# Altium PCB PCB1.PcbDoc (part 1 of 2)
Units mil, origin at the board's own origin, x right, y up, seen from the top; angles counter-clockwise.
Board outline 3937.01 x 3937.01 mil, 2 copper layers (Top Layer, Bottom Layer); 175 components, 130 nets, 583 pads, 648 vias.
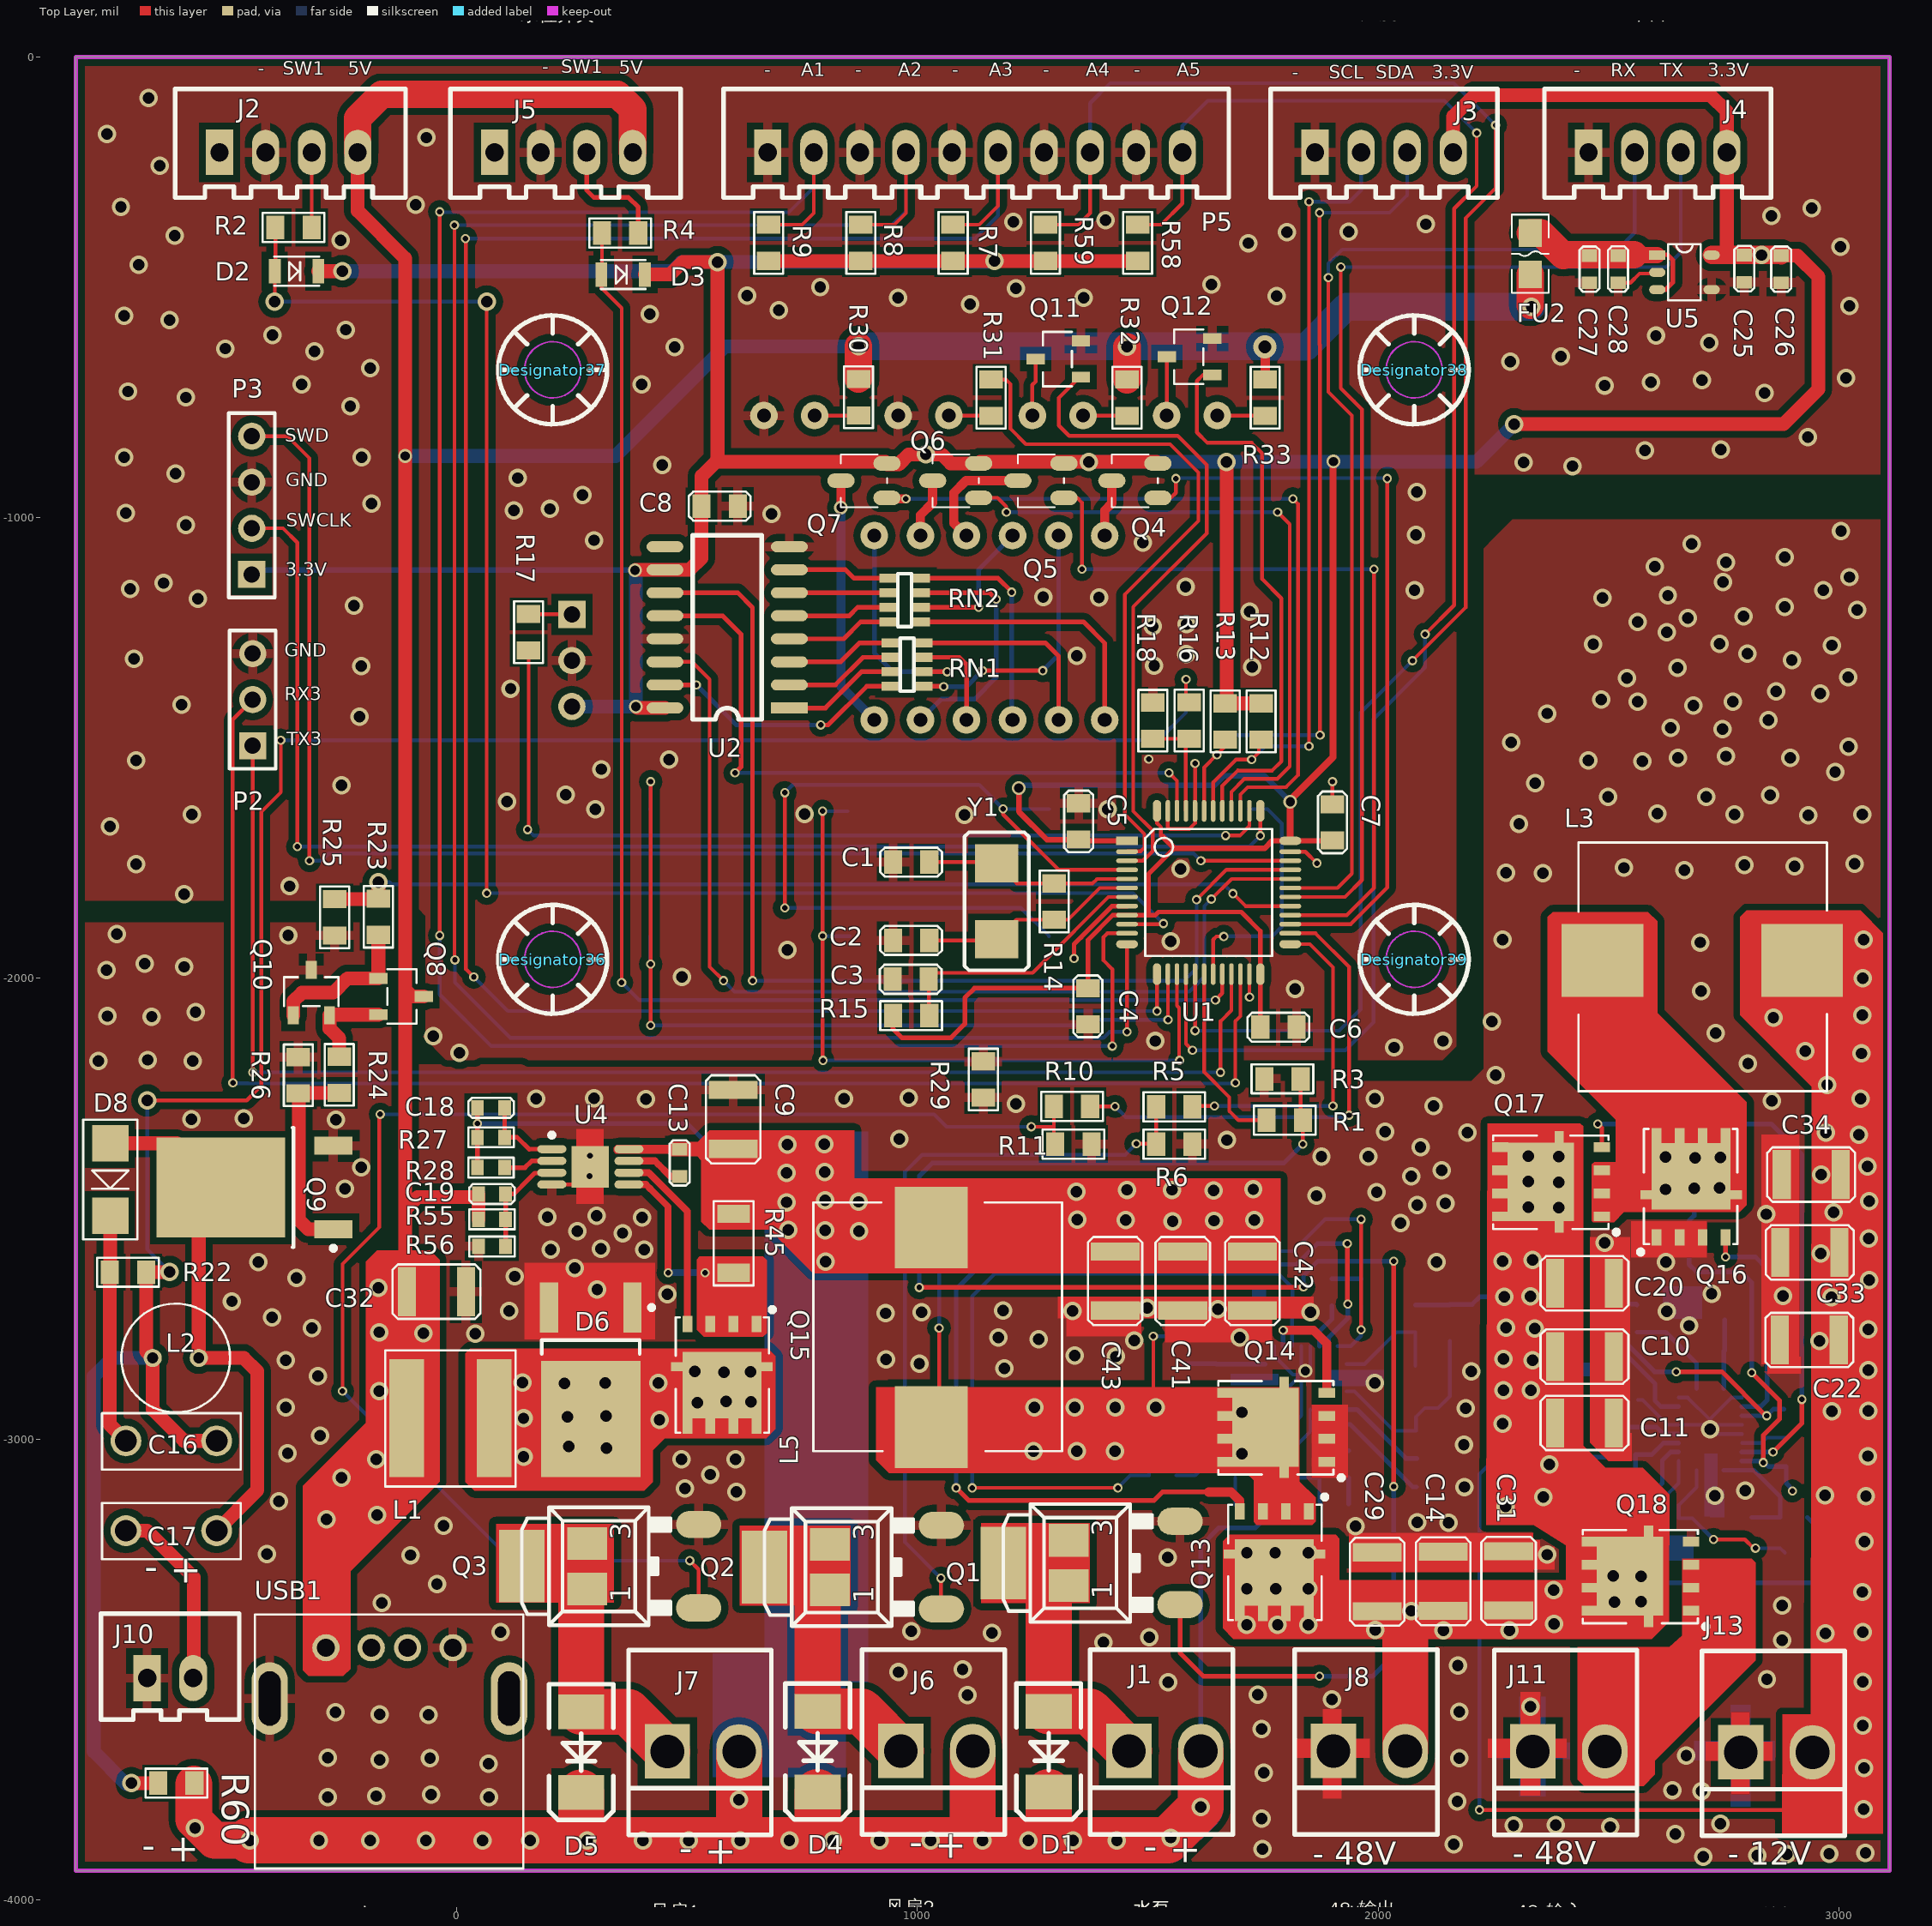
[diagram p0: Top Layer view]
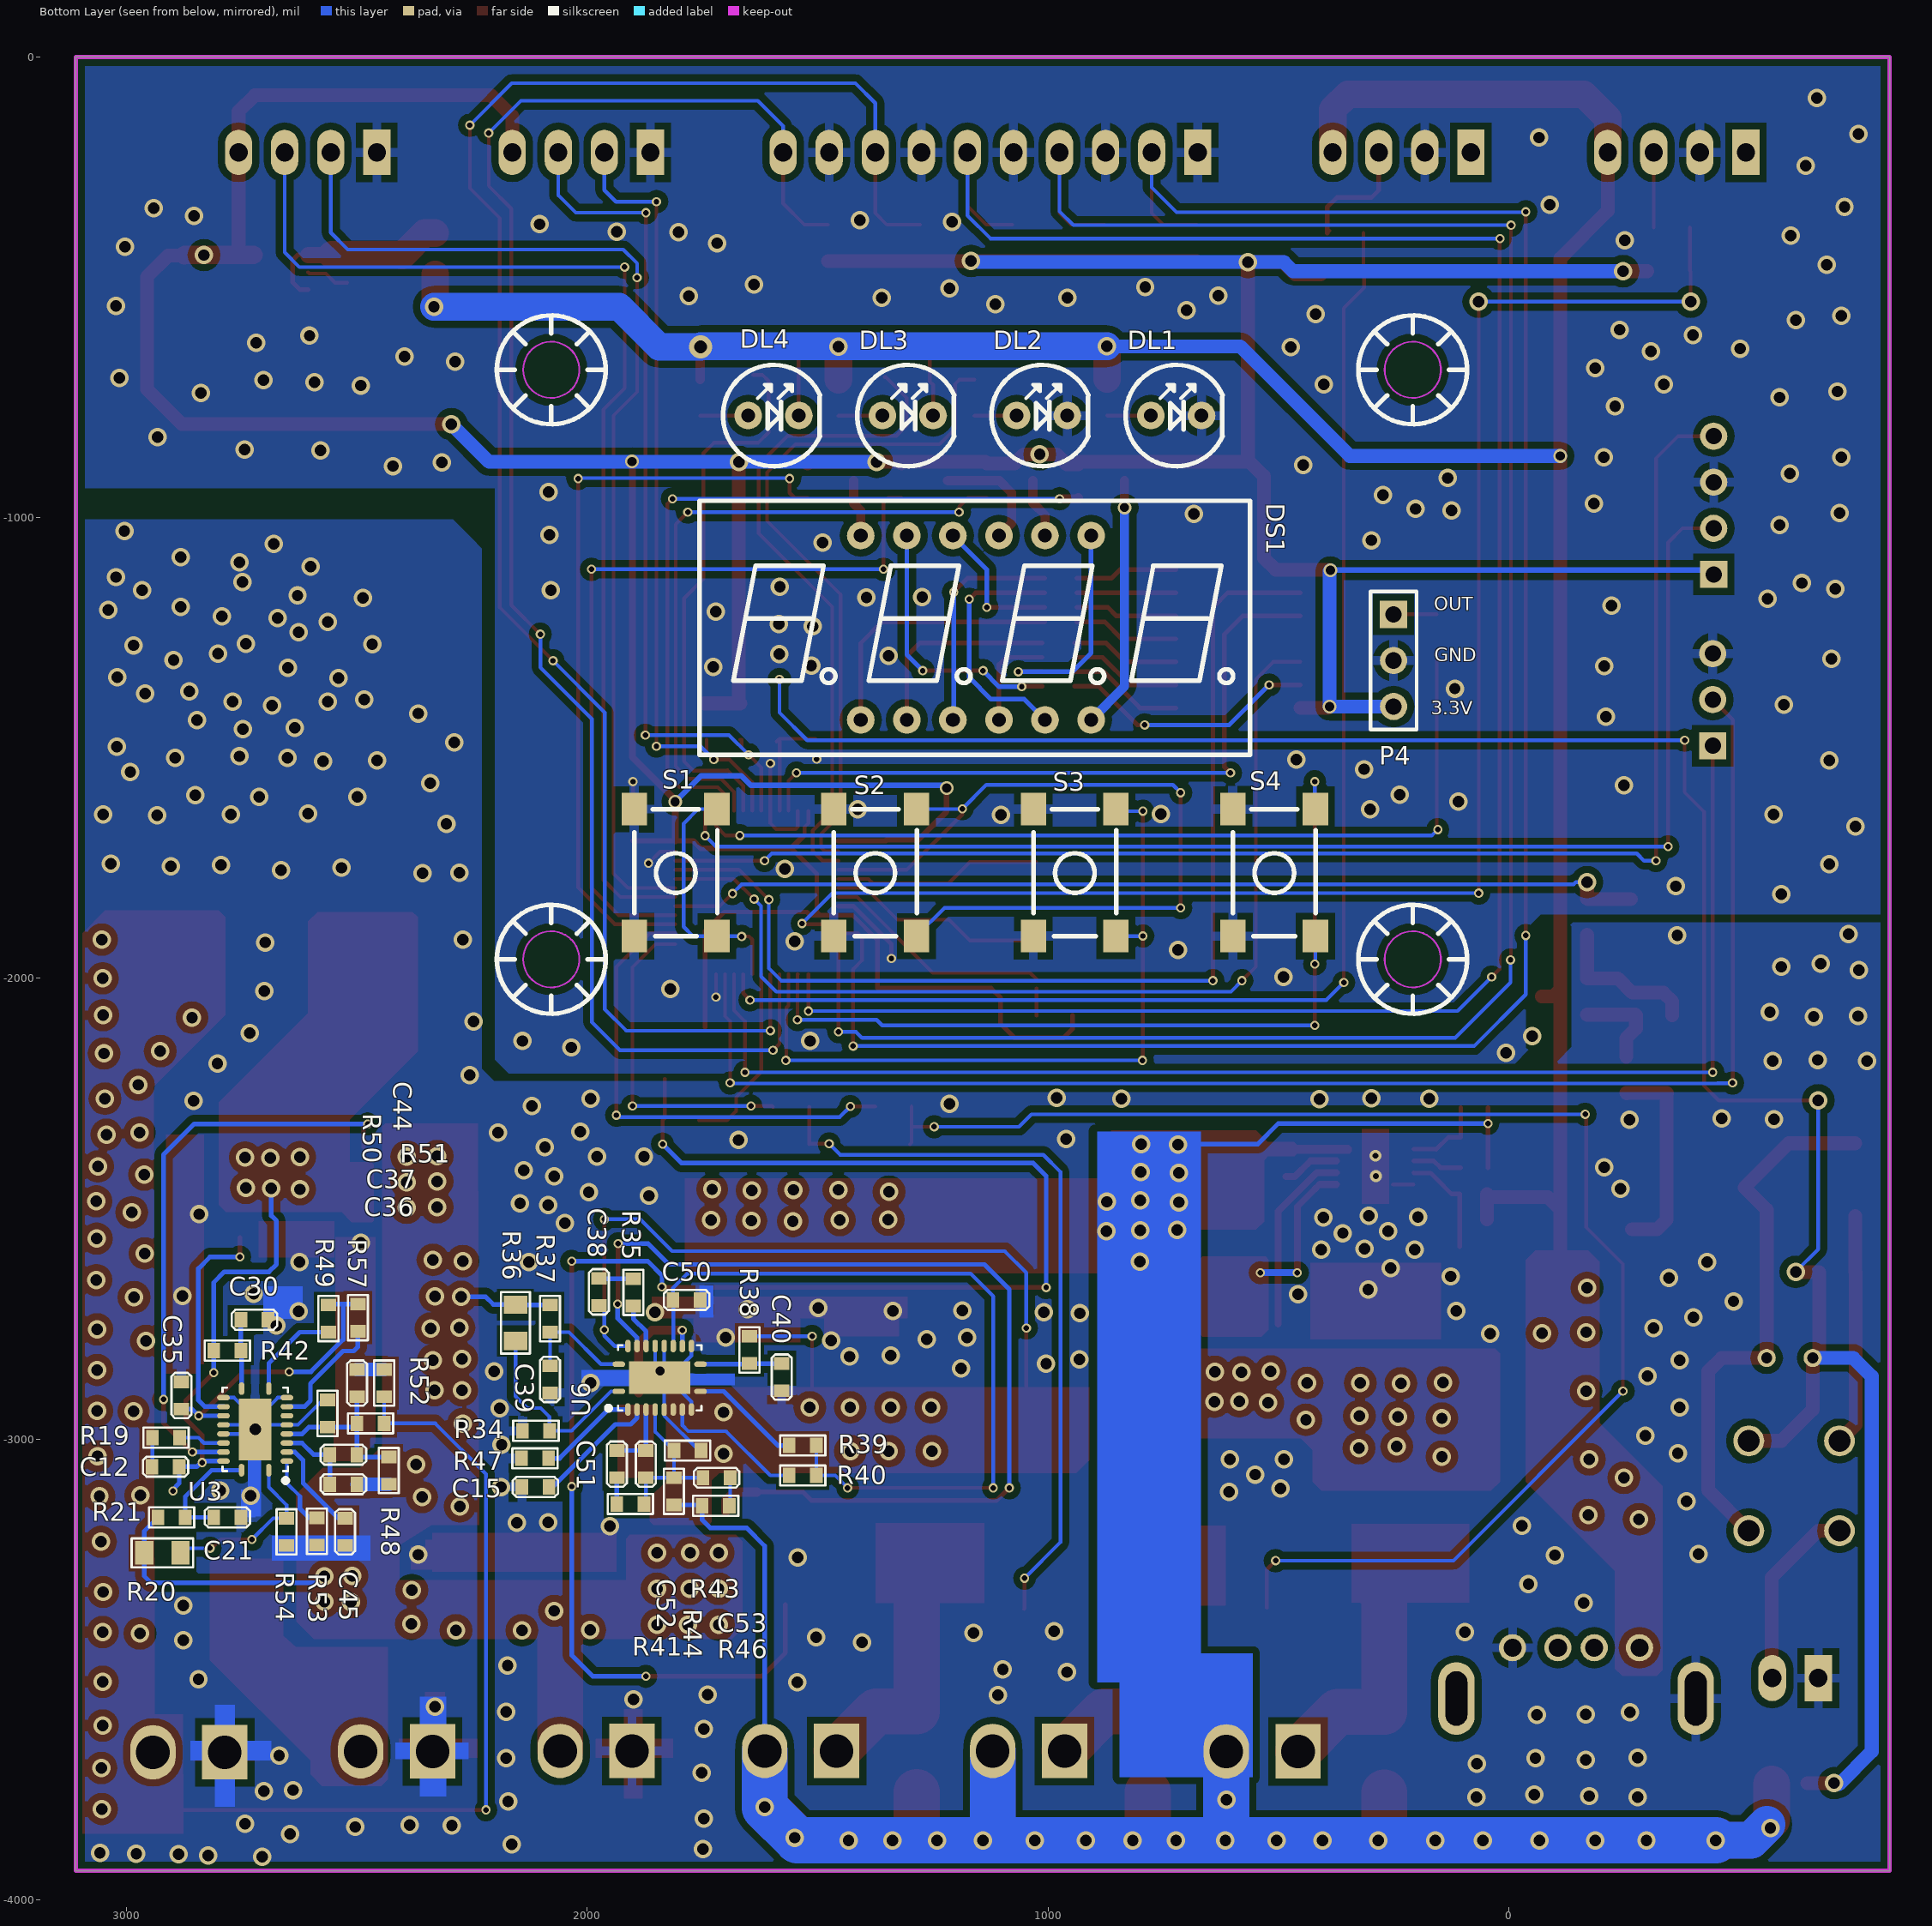
[diagram p1: Bottom Layer view, seen from below]

## Layer stack, top to bottom
Top Layer: signal copper 1.4
Dielectric: dielectric 12.6, FR-4, Dk 4.8
Bottom Layer: signal copper 1.4

## Board outline
-826.77,-3937.01 3110.24,-3937.01 3110.24,0 -826.77,0

## Design rules (kind name [scope] priority, off if disabled: settings)
Clearance Clearance_1 [InPoly And InNet(GND)  Or InNet(AGND1)] p1: gap=5
Clearance [All] p2: gap=5
MinimumSolderMaskSliver [All] p1: minsoldermaskwidth=1
PolygonConnect PolygonConnect_2 [InNet('GND') vs R29] p1: connectstyle=Direct reliefconductorwidth=10 reliefentries=4 polygonreliefangle="90 Angle"
PolygonConnect PolygonConnect_1 [IsVia] p2: connectstyle=Direct reliefconductorwidth=10 reliefentries=4 polygonreliefangle="90 Angle"
PolygonConnect [All] p3: connectstyle=Relief reliefconductorwidth=20 reliefentries=4 polygonreliefangle="90 Angle"
RoutingVias [All] p1: holewidth=28 width=50 viastyle="Through Hole" minholewidth=28 minwidth=50 maxholewidth=28 maxwidth=50
SilkToSilkClearance [All] p1: silktosilkclearance=1
SilkscreenOverComponentPads [All] p1: minsilkscreentomaskgap=1
SolderMaskExpansion [All] p1: expansion=4
Width [All] p1: maxlimit=200 minlimit=6 preferedwidth=10
25 further rules are at their usual default settings.

## Classes and differential pairs
component class Humidifier: C14 C15 C16 C17 C29 C31 C38 C39 C40 C41 C42 C43 C50 C51 C52 C53 D8 J10 L2 L5 Q8 Q9 Q10 Q13 Q14 R22 R23 R24 R25 R26 R34 R35 R36 R37 R38 R39 R40 R41 R43 R44 R46 R47 R60 U6
component class cpu: C1 C2 C3 C4 C5 C6 C7 P2 P3 P4 R12 R13 R14 R15 R16 R17 R18 U1 Y1
component class Display: C8 DS1 Q4 Q5 Q6 Q7 RN1 RN2 S1 S2 S3 S4 U2
component class Connector: D1 D2 D3 D4 D5 J1 J2 J3 J4 J5 J6 J7 J8 P5 Q1 Q2 Q3 R1 R2 R3 R4 R5 R6 R7 R8 R9 R10 R11 R58 R59
component class POWER: C9 C13 C18 C19 C25 C26 C27 C28 C32 D6 DL1 DL2 DL3 DL4 FU2 L1 Q11 Q12 Q15 R27 R28 R29 R30 R31 R32 R33 R45 R55 R56 U4 U5 USB1
component class POWER2: C9 C10 C11 C12 C13 C15 C22 C30 C33 C34 C35 C36 C37 C44 J11 J12 J13 L1 Q13 Q14 Q18 R19 R20 R21 R34 R38 R39 R40 R41 R43 R44 R46 R47 U3

## Components (designator, comment, footprint, x,y, rotation, side; value= is the part's Value field where it differs from the comment)
C1 "22pF" 0805c 947,-1747.62 r0 top
C2 "22pF" 0805c 947,-1917.62 r0 top
C3 "100nF" 0805c 946,-2002 r0 top
C4 "100nF" 0805c 1370,-2100 r90 top
C5 "100nF" 0805c 1350,-1620 r270 top
C6 "100nF" 0805c 1823,-2106 r180 top
C7 "100nF" 0805c 1901,-1622 r270 top
C8 "10uF" 0805c 610,-975 r180 top
C9 "10uF/35V" 1210C 600,-2370 r90 top
C10 "GRM32ER72A225KA35L" 1210C 2384,-2821 r0 top
C11 "GRM32ER72A225KA35L" 1210C 2384,-2965 r0 top
C12 "0.1uF/25V" 0603C 2945,-3060 r180 bottom
C13 "470nF/25V" 0603C 484,-2430 r90 top
C14 "GRM32ER72A225KA35L" 1210C 2141.17,-3372.72 r90 top
C15 "18nF/16V" 0603C 2083,-3104 r0 bottom
C16 "1nF/100V" CAP_5MM -718,-3004 r0 top
C17 "0.047F/250V" CAP_5MM -718,-3199 r0 top
C18 "1nF/25V" 0603C 45,-2281 r0 top
C19 "820pF/25V" 0603C 47.06,-2468 r0 top
C20 "GRM32ER72A225KA35L" 1210C 2384,-2662 r0 top
C21 "C1608X7S2A104K080AB" 0603C 2752,-3170 r0 bottom
C22 "GRM32ER71A476KE15L" 1210C 3000,-2785 r180 top
C25 "0.1uF/10V" 0603C 2795,-430 r270 top
C26 "10uF/10V" 0603C 2875,-490 r90 top
C27 "10uF/10V" 0603C 2459,-490 r90 top
C28 "0.1uF/10V" 0603C 2520.92,-430.92 r270 top
C29 "GRM32ER72A225KA35L" 1210C 1998.17,-3373.72 r90 top
C30 "6.8pF/100V" 0603C 2693,-2741 r0 bottom
C31 "GRM32ER72A225KA35L" 1210C 2283.22,-3371.72 r90 top
C32 "GRM32ER71A476KE15L" 1210C -108,-2680 r0 top
C33 "GRM32ER71A476KE15L" 1210C 3001,-2595 r180 top
C34 "GRM32ER71A476KE15L" 1210C 3004,-2426 r180 top
C35 "EMK107BB7225MA-T" 0603C 2881,-2935 r90 bottom
C36 "27nF/16V" 0603C 2559,-3098 r180 bottom
C37 "1pF/16V" 0603C 2559,-3034 r180 bottom
C38 "0.1uF/25V" 0603C 1975,-2651 r270 bottom
C39 "C1608X7S2A104K080AB" 0603C 2081,-2900 r90 bottom
C40 "5.1pF/100V" 0603C 1578,-2895 r90 bottom
C41 "GRM32ER71A476KE15L" 1210C 1576,-2593 r270 top
C42 "GRM32ER71A476KE15L" 1210C 1727,-2593 r270 top
C43 "GRM32ER71A476KE15L" 1210C 1429,-2593 r270 top
C44 "680pF/16V" 0603C 2500,-2908 r90 bottom
C45 "18nF/16V" 0603C 2526,-3172 r270 bottom
C50 "EMK107BB7225MA-T" 0603C 1814,-2698 r180 bottom
C51 "18nF/16V" 0603C 1936,-3025 r270 bottom
C52 "1pF/16V" 0603C 1873,-3024.94 r270 bottom
C53 "560pF/16V" 0603C 1749,-3083.94 r180 bottom
D1 "1N4004" D7227 1284.97,-3591 r270 top
D2 "1N4148" sod323 -395,-465 r0 top
D3 "1N4148" sod323 314,-472 r0 top
D4 "1N4004" D7227 783.49,-3591 r270 top
D5 "1N4004" D7227 270,-3592 r270 top
D6 "SBRD10200TR" TO228P970-3N 291,-2872 r270 top
D8 "FR104" SMA -752,-2358 r270 top
Designator36 "Comment" M3.1 208.2,-1958.6 r0 top
Designator37 "Comment" M3.1 208.2,-679.07 r0 top locked
Designator38 "Comment" M3.1 2078.28,-679.07 r0 top locked
Designator39 "Comment" M3.1 2078.28,-1958.6 r0 top locked
DL1 "红" LED-3 721.72,-778.37 r180 bottom locked
DL2 "绿" LED-3 1013.06,-778.37 r180 bottom locked
DL3 "黄" LED-3 1304.4,-778.37 r180 bottom locked
DL4 "黄" LED-3 1595.74,-778.37 r180 bottom locked
DS1 "SR410561K" SR410361 1156.49,-1239 r180 bottom locked
FU2 "500mA/6V" F0805 2330,-472 r90 top
J1 "OUT-A" CH3.96-2P 1615,-3677 r0 top
J2 "IIC" SIP-4L -515,-207 r0 top
J3 "IIC" SIP-4L 1863,-207 r0 top
J4 "USRT" SIP-4L 2457,-207 r0 top
J5 "IIC" SIP-4L 82,-207 r0 top
J6 "OUT-B" CH3.96-2P 1120,-3677 r0 top
J7 "OUT-C" CH3.96-2P 613,-3678 r0 top
J8 "SIP2-2.54" CH3.96-2P 2059,-3677 r0 top
J10 "SIP2-2.54" SIP-2L -622,-3519 r0 top
J11 "SIP2-2.54" CH3.96-2P 2492,-3678 r0 top
J13 "OUT-B" CH3.96-2P 2943,-3680 r0 top
L1 "XAL7070-332MEB" XAL7070 81,-2955 r180 top
L2 "10uH" 6*8 -610,-2824 r0 top
L3 "SRP1770TA-6R8M" SRP1270-2R2M 2487,-1961 r0 top
L5 "74437358082" SRP1270-2R2M 1030,-2974 r90 top
P2 "Header 3" HDR1X3 -443,-1495 r90 top
P3 "Header 4" HDR1X4 -445,-1123 r90 top
P4 "Header 3" HDR1X3 250,-1210 r270 bottom
P5 "Header 10" SIP-10L 675,-207 r0 top
Q1 "NCE4060K" TO-252-3S 1324,-3269 r90 top
Q2 "NCE4060K" TO-252-3S 806,-3278 r90 top
Q3 "NCE4060K" TO-252-3S 279,-3276 r90 top
Q4 "S8550" SOT-23_B 1522,-957 r90 top
Q5 "S8550" SOT-23_B 1318,-957 r90 top
Q6 "S8550" SOT-23_B 1133,-957 r90 top
Q7 "S8550" SOT-23_B 934,-957 r90 top
Q8 "S8050" SOT23-3 -170,-2000 r180 top
Q9 "12N10L" TO230P973X238-3N -439,-2454 r180 top
Q10 "S9015" SOT23-3 -355,-2080 r270 top
Q11 "S8050" SOT23-3 1355,-695 r0 top
Q12 "S8050" SOT23-3 1640,-690 r0 top
Q13 "CSD19537Q3" "PowerPAK SO-8" 1876.17,-3119.72 r270 top
Q14 "CSD19537Q3" "PowerPAK SO-8" 1926,-3076 r180 top
Q15 "Si7149DP" "PowerPAK SO-8" 677,-2713 r270 top
Q16 "FDWS86068-F085" "PowerPAK SO-8" 2578,-2600 r90 top
Q17 "CSD19537Q3" "PowerPAK SO-8" 2523,-2543 r180 top
Q18 "SI7489DP" "PowerPAK SO-8" 2717,-3399 r180 top
R1 "22R" 0805R 1758,-2308 r0 top
R2 "10K" 0805R -315,-370 r180 top
R3 "470K" 0805R 1753,-2218 r0 top
R4 "10K" 0805R 394,-382 r180 top
R5 "22R" 0805R 1597,-2279 r180 top
R6 "470k" 0805R 1597,-2359.74 r180 top
R7 "10K" 0805R 1077.5,-364 r270 top
R8 "10K" 0805R 877.25,-364 r270 top
R9 "10K" 0805R 677,-364 r270 top
R10 "22R" 0805R 1375,-2278 r180 top
R11 "470k" 0805R 1378,-2359.74 r180 top
R12 "2K" 0805R 1746,-1403 r270 top
R13 "2K" 0805R 1668,-1403 r270 top
R14 "1MR" 0805R 1297,-1872.62 r90 top
R15 "10K" 0805R 947,-2081 r0 top
R16 "47K" 0805R 1590,-1401 r270 top
R17 "100" 0805R 156,-1288 r90 top
R18 "10K" 0805R 1511,-1480 r90 top
R19 "0" 0603R 2944,-2997 r180 bottom
R20 "121K" 0805R 2883,-3247 r0 bottom
R21 "2.2" 0603R 2932,-3170 r180 bottom
R22 "1K" 0805R -753,-2638 r0 top
R23 "470" 0805R -170,-1827 r270 top
R24 "10" 0805R -255,-2170 r270 top
R25 "1K" 0805R -265,-1907 r90 top
R26 "47K" 0805R -344,-2171 r270 top
R27 "2.94K" 0603R 45,-2345 r0 top
R28 "44.2K" 0603R 104,-2411 r180 top
R29 "0R" 0805R 1143,-2259 r90 top
R30 "2K" 0805R 872,-778 r90 top
R31 "2K" 0805R 1160,-779 r90 top
R32 "2K" 0805R 1455,-779 r90 top
R33 "2K" 0805R 1755,-779 r90 top
R34 "8.06K" 0603R 2141,-2982 r180 bottom
R35 "0" 0603R 1900,-2652 r270 bottom
R36 "121K" 0805R 2156,-2787 r90 bottom
R37 "2.2" 0603R 2081,-2709 r270 bottom
R38 "1.62K" 0603R 1648,-2777 r270 bottom
R39 "20K" 0603R 1562,-3014 r180 bottom
R40 "20K" 0603R 1562,-3079 r180 bottom
R41 "3.16K" 0603R 1877,-3140.94 r0 bottom
R42 "1.62K" 0603R 2811,-2808 r180 bottom
R43 "1.27K" 0603R 1812,-3024.94 r180 bottom
R44 "18K" 0603R 1812,-3142.94 r90 bottom
R45 "10mR" 1206R 601,-2511 r270 top
R46 "28" 0603R 1751,-3144.94 r180 bottom
R47 "46.4K" 0603R 2143,-3042 r180 bottom
R48 "2.32K" 0603R 2431,-3039 r270 bottom
R49 "20K" 0603R 2562,-2768 r90 bottom
R50 "1.27K" 0603R 2564,-2974 r90 bottom
R51 "18K" 0603R 2441,-2966 r0 bottom
R52 "14.7" 0603R 2441,-2908 r90 bottom
R53 "28K" 0603R 2587,-3230 r90 bottom
R54 "8.06K" 0603R 2653,-3231 r90 bottom
R55 "10K" 0603R 47.06,-2523 r0 top
R56 "3.32K" 0603R 106.06,-2582 r180 top
R57 "20K" 0603R 2498,-2766 r90 bottom
R58 "10K" 0805R 1478,-364 r270 top
R59 "10K" 0805R 1277.75,-442.74 r90 top
R60 "2A保险丝" 0805R -648,-3747 r0 top
RN1 "8P100R 0603" 8P4R_0603 942.45,-1271.56 r0 top
RN2 "8P100R 0603" 8P4R_0603 937.45,-1131.56 r0 top
S1 "SW-PB" BUTTON_SMT_6*6 1808.34,-1770.5 r90 bottom locked
S2 "SW-PB" BUTTON_SMT_6*6 1375.27,-1770.5 r90 bottom locked
S3 "SW-PB" BUTTON_SMT_6*6 942.2,-1770.5 r90 bottom locked
S4 "SW-PB" BUTTON_SMT_6*6 509.13,-1770.5 r90 bottom locked
U1 "STM32F103C8T6" TQFP-48 1455,-1725 r0 top
U2 "SN74HC595D" SO-16N 765,-1440 r180 top
U3 "LM5145" QFN050P600-8N 2721,-2979 r0 bottom
U4 "LM25085" SOP65P490X265_HS-8N 290,-2409 r0 top
U5 "TLV70233DBVR" SOT23-5(DBV) 2606,-430 r0 top
U6 "LM5145" QFN050P600-8N 1843,-2867 r90 bottom
USB1 "Header 5" USB-A -284,-3453 r0 top
Y1 "8MHz" SMT5032 1172,-1832.62 r90 top

## Footprints (in the part's own frame and the unit in brackets; to place one, negate y for a bottom-side part, rotate by r counter-clockwise, add the part's x,y. Pads: shape width x height; smd on the part's side, far side on the other; paste and mask are expansions set on the pad)
6*8 [mm]
  round 1 hole 0.6: 1(1.27,0) 2(-1.27,0)
  silkscreen extent -3,-3 3,3
8P4R_0603 [mil]
  rect 40x19.68 smd: 1(0,0) 2(70,0) 3(0,-31.49) 4(70,-31.49) 5(0,-62.99) 6(70,-62.99) 7(0,-94.49) 8(70,-94.49)
  silkscreen extent 20,-105 50,10
0603C [mm]
  rect 0.7x0.85 smd: 1(0,0) 2(1.5,0)
  silkscreen extent -0.5,-0.55 2,0.55
0603R [mm]
  rect 0.7x0.85 smd: 1(0,0) 2(1.5,0)
  silkscreen extent -0.5,-0.55 2,0.55
0805c [mm]
  rect 1x1.3 smd: 1(0,0) 2(2,0)
  silkscreen extent -0.7,-0.8 2.7,0.8
0805R [mm]
  rect 1x1.3 smd: 1(0,0) 2(2,0)
  silkscreen extent -0.7,-0.8 2.7,0.8
1206R [mm]
  rect 1x1.8 smd: 1(0,0) 2(3.25,0)
  silkscreen extent -0.7,-1.1 3.95,1.1
1210C [mm]
  rect 1x2.7 smd: 1(0,0) 2(3.25,0)
  silkscreen extent -0.8,-1.5 4.05,1.5
BUTTON_SMT_6*6 [mm]
  rect 1.8x1.4 smd paste+0: 1(-3.5,2.275) 1(3.5,2.275) 2(-3.5,-2.275) 2(3.5,-2.275)
  silkscreen extent -3.5,-2.3 3.48,2.27
CAP_5MM [mm]
  round 1.7 hole 1.2: 1(0,0) 2(5,0)
  silkscreen extent -1.32,-1.57 6.32,1.52
CH3.96-2P [mm]
  rect 2.5x3 hole 1.85: 1(-3.96,0)
  oval 2.5x3 hole 1.85: 2(0,0)
  silkscreen extent -6.1,-4.6 1.78,5.59, body extent -5.94,-3.91 1.92,4.59, height 10.9
D7227 [mil]
  rect 75x100 smd: A(0,0) K(175,0)
  silkscreen extent -60,-70 235,70, body extent -22,-57 194,53, height 88
F0805 [mil]
  rect 60x50 smd: 1(0,0) 2(90,0)
  silkscreen extent -40,-40 130,40, body extent 4,-23 82,24, height 20
HDR1X3 [mm] "Connector; Header; 3 Position"
  rect 1.5x1.5 hole 0.9: 1(0,0)
  round 1.5 hole 0.9: 2(2.54,0) 3(5.08,0)
  silkscreen extent -1.27,-1.27 6.35,1.27
HDR1X4 [mm] "Connector; Header; 4 Position"
  rect 1.5x1.5 hole 0.9: 1(0,0)
  round 1.5 hole 0.9: 2(2.54,0) 3(5.08,0) 4(7.62,0)
  silkscreen extent -1.27,-1.27 8.89,1.27
LED-3 [mil]
  round 60 hole 30: A(-55,0) K(55,0)
  silkscreen extent -110,-110 101,110
M3.1 [mil]
  Keep-Out Layer circle w3.94: c0,0 r61.02
  silkscreen extent -118,-118 118,118
"PowerPAK SO-8" [mm]
  rect 0.9x0.54 smd: 1(0.95,-0.67) 2(0.95,-1.94) 3(0.95,-3.21) 4(0.95,-4.48) 5(6.548,-4.48) 6(6.548,-3.21) 7(6.548,-1.94) 8(6.548,-0.67)
  rect 0.5x1.6 smd: 5(3.3,-4.575) 8(3.3,-0.575)
  rect 3.66x2.5 smd: 5(4.325,-3.495)
  rect 3.66x2 smd: 8(4.325,-1.401)
  silkscreen extent 0.03,-5.12 6.93,0.33
QFN050P600-8N [mm]
  oval 0.3x0.7 smd: 1(-0.75,2.25) 10(-0.75,-2.25) 11(0.75,-2.25) 20(0.75,2.25)
  oval 0.7x0.3 smd: 2(-1.75,1.75) 3(-1.75,1.25) 4(-1.75,0.75) 5(-1.75,0.25) 6(-1.75,-0.25) 7(-1.75,-0.75) 8(-1.75,-1.25) 9(-1.75,-1.75) 12(1.75,-1.75) 13(1.75,-1.25) 14(1.75,-0.75) 15(1.75,-0.25) 16(1.75,0.25) 17(1.75,0.75) 18(1.75,1.25) 19(1.75,1.75)
  rect 1.8x3.4 smd: 21(0,0)
  silkscreen extent -1.8,-2.3 1.8,2.94, body extent -1.8,-2.3 1.8,2.3, height 0.8
SIP-2L [mil]
  rect 60x100 hole 40: 1(-50,0)
  oval 60x100 hole 40: 2(50,0)
  silkscreen extent -150,-90 150,140
SIP-4L [mm]
  rect 1.5x2.5 hole 1: 1(0,0)
  oval 1.5x2.5 hole 1: 2(2.54,0) 3(5.08,0) 4(7.62,0)
  silkscreen extent -2.44,-2.5 10.26,3.5
SIP-10L [mm]
  rect 1.5x2.5 hole 1: 1(0,0)
  oval 1.5x2.5 hole 1: 2(2.54,0) 3(5.08,0) 4(7.62,0) 5(10.16,0) 6(12.7,0) 7(15.24,0) 8(17.78,0) 9(20.32,0) 10(22.86,0)
  silkscreen extent -2.44,-2.5 25.43,3.5
SMA [mm]
  rect 2x2 smd: 1(0,0) 2(4,0)
  silkscreen extent -1.3,-1.5 5.3,1.5
SMT5032 [mm]
  rect 2.1x2.4 smd: 1(-2.1,0) 2(2.1,0)
  silkscreen extent -3.81,-1.78 3.81,1.78
SO-16N [mil]
  rect 80x24 smd: 1(43,-27)
  oval 80x24 smd: 2(43,-77) 3(43,-127) 4(43,-177) 5(43,-227) 6(43,-277) 7(43,-327) 8(43,-377) 9(313,-377) 10(313,-327) 11(313,-277) 12(313,-227) 13(313,-177) 14(313,-127) 15(313,-77) 16(313,-27)
  silkscreen extent 103,-402 253,-2, body extent 62,-403 300,3, height 84
sod323 [mm]
  rect 0.65x1.35 smd: A(0,0) K(2.4,0)
  silkscreen extent -0.03,-0.8 2.44,0.8
SOP65P490X265_HS-8N [mm] "SOP, 8-Leads, Body 3.1x3.1mm (max), Pitch 0.65mm, IPC Medium Density"
  oval 1.6x0.45 smd: 1(-2.125,0.975) 2(-2.125,0.325) 3(-2.125,-0.325) 4(-2.125,-0.975) 5(2.125,-0.975) 6(2.125,-0.325) 7(2.125,0.325) 8(2.125,0.975)
  rect 2.05x2.3 smd: 9(0,0)
  silkscreen extent -2.25,1.63 -2,1.87, body extent -1.55,-1.55 1.55,1.55, height 2.65
SOT23-3 [mm]
  rect 1x0.6 smd: 1(0,0) 2(0,2) 3(-2.5,1)
  silkscreen extent -2.1,-0.5 -0.5,2.5
SOT23-5(DBV) [mm]
  rect 0.9x0.5 smd: 1(0,0)
  oval 0.9x0.5 smd: 2(0,-0.95) 3(0,-1.9) 4(3,-1.9) 5(3,0)
  silkscreen extent 0.6,-2.5 2.4,0.6
SOT-23_B [mm]
  oval 0.8x1.5 smd: 1(0,0) 2(1.9,0) 3(0.95,2.54)
  silkscreen extent -0.51,0 2.4,2.54, body extent -0.48,-0.13 2.42,2.67, height 1.2
SR410361 [mil]
  round 60 hole 30: a(-150,200) b(250,200) c(50,-200) com1(-250,200) com2(50,200) com3(150,200) com4(250,-200) d(-150,-200) dp(-50,-200) e(-250,-200) f(-50,200) g(150,-200)
  silkscreen extent -600,-276 595,276, body extent -591,-275 591,276, height 287
SRP1270-2R2M [mm]
  rect 4.5x4 smd: 1(0,0) 2(11,0)
  silkscreen extent -1.32,-7.21 12.38,6.5
TO228P970-3N [mm]
  rect 2.75x1 smd: 1(-4,2.3) 3(-4,-2.3)
  rect 6.4x5.5 smd: 2(2.15,0)
  silkscreen extent -4.12,-2.7 -1.45,3.48, body extent -2.2,-2.7 3.5,2.7, height 2.38
TO230P973X238-3N [mm] "D-PAK, 3-Pads, Body 6.2x6.6mm (max), IPC Medium Density"
  rect 2.1x1 smd: 1(-4.35,2.3) 3(-4.35,-2.3)
  rect 7.1x5.5 smd: 2(1.85,0)
  silkscreen extent -4.48,-3.3 -2.1,3.47, body extent -2.15,-3.3 4.05,3.3, height 2.38
TO-252-3S [mm]
  oval 1.5x2.5 smd: 1(-2.3,-6.25) 3(2.3,-6.25)
  rect 1.8x2.2 smd: 2(-1.25,-0.1) 2(1.25,-0.1)
  rect 4x2.5 smd: 2(0,3.5)
  silkscreen extent -3.25,-4.7 3.25,3.5
TQFP-48 [mm]
  rect 1.2x0.45 smd: 1(0,0.6)
  oval 1.2x0.25 smd: 2(0,0) 3(0,-0.5) 4(0,-1) 5(0,-1.5) 6(0,-2) 7(0,-2.5) 8(0,-3) 9(0,-3.5) 10(0,-4) 11(0,-4.5) 26(9,-4.5) 27(9,-4) 28(9,-3.5) 29(9,-3) 30(9,-2.5) 31(9,-2) 32(9,-1.5) 33(9,-1) 34(9,-0.5) 35(9,0)
  oval 1.2x0.45 smd: 12(0,-5.1) 25(9,-5.1) 36(9,0.6)
  oval 0.45x1.2 smd: 13(1.65,-6.75) 24(7.35,-6.75) 37(7.35,2.25) 48(1.65,2.25)
  oval 0.25x1.2 smd: 14(2.25,-6.75) 15(2.75,-6.75) 16(3.25,-6.75) 17(3.75,-6.75) 18(4.25,-6.75) 19(4.75,-6.75) 20(5.25,-6.75) 21(5.75,-6.75) 22(6.25,-6.75) 23(6.75,-6.75) 38(6.75,2.25) 39(6.25,2.25) 40(5.75,2.25) 41(5.25,2.25) 42(4.75,2.25) 43(4.25,2.25) 44(3.75,2.25) 45(3.25,2.25) 46(2.75,2.25) 47(2.25,2.25)
  silkscreen extent 1,-5.75 8,1.25
USB-A [mm]
  round 1.5 hole 1: 1(0,0) 2(2.5,0) 3(4.5,0) 4(7,0)
  oval 2x4 hole 1.2 slot 3 at 90 deg: 5(-3.1,-2.8) 6(10.1,-2.8)
  silkscreen extent -3.91,-12.17 10.89,1.83
XAL7070 [mm]
  rect 1.92x6.5 smd: 1(0,0) 2(4.82,0)
  silkscreen extent -1.19,-3.74 6.01,3.76

## Part data
C1 C2 C3 C4 C5 C6 C7 C8: library part CAP, "Capacitor"
C9 C10 C11 C12 C13 C14 C15 C18 C19 C20 C21 C22 C29 C30 C31 C32 C33 C34 C35 C36 C37 C38 C39 C40 C41 C42 C43 C44 C45 C50 C51 C52 C53: library part 0.01UF, "CCX85-103"
C16 C17 C25 C26 C27 C28: library part Cap, "Capacitor"
D1 D4 D5 D6 D8: library part Diode_2, "Default Diode"
D2 D3: library part Diode, "Default Diode"
DL1 DL2 DL3 DL4: library part L-7113SRD-D, "CP-L-7113SRD-D"
DS1: "CP-SR410561K"
FU2: library part FUSE2, "Fuse"
J1 J6 J7 J13: library part CON2, "Connector"
J2 J3 J4 J5: library part SIP4-2.54, "CN-SIP4-2.54"
J8 J10 J11: "CN-SIP2-2.54"
L1 L3 L5: library part INDUCTOR
L2: library part Inductor, "Inductor"
P2 P4: "Header, 3-Pin"
P3: "Header, 4-Pin"
P5: "Header, 10-Pin"
Q1 Q2 Q3: "NMOSFET"
Q4 Q5 Q6 Q7: library part PNP, "PNP Transistor"
Q8 Q11 Q12: library part NPN, "NPN Bipolar Transistor"
Q9: library part MOSFET-N, "N-Channel MOSFET"
Q10: library part PNP, "PNP Bipolar Transistor"
Q13 Q14 Q15 Q16 Q17 Q18: library part Si4004DY, "Si4004DY"
R1 R2 R3 R4 R5 R6 R7 R8 R9 R10 R11 R30 R31 R32 R33 R58 R59: library part 1K, "CR85-102J"
R12 R13 R14 R15 R16 R17 R18 R19 R35 R38 R41 R42 R43 R44 R46 R48 R50 R51 R52: library part Res3, "Resistor"
R20 R21 R27 R28 R34 R36 R37 R39 R40 R45 R47 R49 R53 R54 R55 R56 R57: library part "Res Semi", "Semiconductor Resistor"
R22 R23 R24 R25 R26 R29 R60: library part RES1
RN1 RN2: library part "8P4R 0603"
S1 S2 S3 S4: "Switch"
U1: "STM32 ARM-based 32-bit MCU with 64 Kbytes Flash, 48-pin LQFP, Industrial Temperature"
U2: "8-Bit Shift Register with 3-State Output Registers"
U5: library part TLV70230DBVR
USB1: "Header, 5-Pin"
Y1: library part XTAL, "Crystal Oscillator"

## Via types
v1: diameter 40, hole 25, Top Layer to Bottom Layer, tented both sides, 514 vias
v2: diameter 20, hole 12, Top Layer to Bottom Layer, tented both sides, 122 vias
v3: diameter 30, hole 20, Top Layer to Bottom Layer, tented both sides, 9 vias
v4: diameter 25.98, hole 12.99, Top Layer to Bottom Layer, tented top, 2 vias
v5: diameter 50, hole 28, Top Layer to Bottom Layer, 1 vias

## Nets (pads, with @x,y where several pads share a name; then routed paths per layer and width w, separated by ;. In a path a pad name is that pad's centre, name@x,y a point inside that pad or via, vN(x,y) a via of type N, cw(c..) or ccw(c..) an arc to the next point about the centre after c; other vN are vias at no path point)
+5V: C19.1 C32.1 FU2.1 J2.4 J5.4 L1.2 Q8.3 R30.2 R32.2 R33.2 R55.1 USB1.1 | length 6443.7
  Top Layer w20: v3(1754,-629) 1755,-630 R33.2@1755,-700.26
  Top Layer w30: J2.4@-215,-207 -215,-334 -112,-437 v3(-112,-866) -112,-2024 ; C32.1@-108,-2680 -112,-2676 -112,-2024 ; -108,-2498 -85,-2475 C19.1@47.06,-2475 ; Q8.3@-71.57,-2039.37 -96.63,-2039.37 -112,-2024 ; R55.1@47.06,-2523 C19.1@47.06,-2468
  Top Layer w60: J2.4@-215,-207 -215,-133 -163,-81 349,-81 382,-114 J5.4@382,-207 ; R30.2@872,-699.26 v1(872,-628) ; R32.2@1455,-700.26 v1(1455,-629) ; v1@2330,-539 FU2.1@2330,-472
  Bottom Layer w30: v3(-112,-866) 345,-866 583,-628 v1(872,-628)
  Bottom Layer w60: v1(872,-628) 1455,-628 1507,-628 v5@1754,-628 ; v3(1754,-629) 1844,-629 1931,-542 v1(2333,-542)
  other v1: -283,-3174 -173,-3165 -250,-3084 -175,-3044 -168,-2896 -72,-2770 -168,-2768 -170,-2672
  other v5: 1754,-629
+12V: C9.1 C13.2 C18.1 C41.1 C42.1 C43.1 D1.K D4.K D5.K J1.2 J6.2 J7.2 L5.2 R27.1 R28.2 R44.1 R45.1 R46.1 R60.2 U4.8 | length 7380.7
  Top Layer w10: R28.2@44.94,-2411 45,-2410.94 R27.1@45,-2345 C18.1@45,-2281
  Top Layer w80: R60.2@-571,-3749 -571,-3826 -526,-3871 v1@-450,-3871
  Top Layer w100: v1@-450,-3871 262,-3871 ; D5.K@270,-3767 270,-3863 262,-3871 ; J7.2@613,-3678 613,-3869 v1@611,-3871 ; D4.K@783.49,-3766 783.49,-3863.51 776,-3871 ; J6.2@1120,-3677 1120,-3867 1116,-3871 ; 1284.97,-3868.03 D1.K@1284.97,-3766 ; J1.2@1615,-3677 v1(1615,-3799) 1543,-3871 1116,-3871 ; 262,-3871 v1@611,-3871 ; v1@611,-3871 776,-3871 ; 776,-3871 1116,-3871
  Bottom Layer w10: v2(45,-2315) 500,-2315 545,-2360 v1@718,-2360 ; J1.2@1615,-3677 1615,-3232 1654,-3193 1733,-3193 1751,-3175 R46.1@1751,-3144.94 1753,-3142.94 R44.1@1812,-3142.94
  Bottom Layer w80: v1@-560.5,-3836.5 -526,-3871 v1(-449,-3871)
  Bottom Layer w100: v1(-449,-3871) 1544,-3871 1615,-3800 J1.2@1615,-3677 ; v1@613,-3867 J7.2@613,-3678 ; 1120,-3868 J6.2@1120,-3677
  other v1: -299,-3871 -188,-3871 -67,-3871 56,-3871 159,-3871 283,-3871 404,-3871 504,-3871 615,-3871 722,-3871 816,-3871 918,-3871 1029,-3871 1141,-3871 1241,-3871 1338,-3871 1433,-3871 1549.69,-3865.31 -568,-3844 613,-3783 801,-2615 873,-2549 800,-2547 720,-2546 1554,-2527 1644,-2526 1452,-2525 1731,-2525 1347,-2524 716,-2486 872,-2485 800,-2482 1345,-2463 1643,-2460 1455,-2459 1553,-2459 1729,-2458 716,-2422 799,-2420 718,-2361 798,-2360
+48V: J11.2 Q18.1 Q18.2 Q18.3
A1: P5.2 R9.1 U1.11 | length 4655
  Top Layer w8: v2(-37,-1907) v2(-37,-336) ; R9.1@677,-364 750,-364 775,-339 P5.2@775,-207 ; v2(1423,-2147) 1423,-1980 1404,-1961 1404,-1910.38 1412.21,-1902.17 U1.11@1455,-1902.17
  Bottom Layer w8: v2(-37,-1907) -37,-2035 75,-2147 v2(1423,-2147) ; v2@-37,-337 694,-337 721,-337 775,-283 P5.2@775,-207
A2: P5.4 R8.1 U1.12 | length 4708.3
  Top Layer w8: v2@-5,-1959 v2(-5,-365) ; R8.1@877.25,-364 950,-364 975,-339 P5.4@975,-207 ; 1455,-2106 U1.12@1455,-1925.79
  Bottom Layer w8: v2(-5,-365) 832.44,-365 ; v2(-4,-1960) -4,-2009 116,-2129 1404,-2129 1417,-2116 v2(1455,-2116) ; 822,-365 832.44,-365 ; P5.4@975,-207 975,-335 945,-365 832.44,-365
A3: P5.6 R7.1 U1.13 | length 4773.6
  Top Layer w8: v2@20,-395 20,-1980 v2(37,-1997) ; R7.1@1077.5,-364 1134,-364 1175,-323 P5.6@1175,-207 ; v2(1519.96,-2071) U1.13@1519.96,-1990.75
  Bottom Layer w8: v2(19,-394) 1017.5,-394 ; v2(37,-1997) 111,-2071 v2(1519.96,-2071) ; 991,-394 1017.5,-394 ; P5.6@1175,-207 1175,-344 1125,-394 1017.5,-394
A4: P5.8 R59.2 U1.17 | length 3834
  Top Layer w8: R59.2@1277.75,-364 1350,-364 1375,-339 P5.8@1375,-207 ; v2(1602.64,-2113.64) U1.17@1602.64,-1990.75 ; v2(2074.5,-1310.5) 2190,-1195 2190,-350 2255,-285 v2(2255,-148)
  Bottom Layer w8: P5.8@1375,-207 1375,-100 1418,-57 2164,-57 v2(2255,-148) ; v2(1602.64,-2113.64) 1915.36,-2113.64 1962,-2067 1962,-1769 ; 1962,-1759 1962,-1769 ; v2(2074.5,-1310.5) 1962,-1423 1962,-1769
A5: P5.10 R58.1 U1.16 | length 3588.4
  Top Layer w8: R58.1@1478,-364 1529,-364 1575,-318 P5.10@1575,-207 ; U1.16@1582.95,-1990.75 1582.95,-2141.95 v2(1597,-2156) ; v2(2102,-1253) 2165,-1190 2165,-329 2214,-280 v2(2214,-165)
  Bottom Layer w8: P5.10@1575,-207 1575,-150 1630,-95 2144,-95 v2(2214,-165) ; v2(1597,-2156) 1929,-2156 1990,-2095 1990,-1437 2102,-1325 v2(2102,-1253) v2@2101,-1252
AGND1: C9.2 C10.2 C11.2 C14.2 C15.2 C20.2 C21.1 C22.2 C29.2 C30.1 C31.2 C32.2 C33.2 C34.2 C35.2 C39.1 C40.1 C41.2 C42.2 C43.2 C45.2 C50.2 D6.1 D6.3 J8.1 J10.1 J11.1 J13.1 Q1.3 Q2.3 Q3.3 Q9.3 Q10.3 Q14.1 Q14.2 Q14.3 Q16.1 Q16.2 Q16.3 Q18.4 R3.1 R6.1 R11.1 R25.1 R26.1 R29.1 R34.1 R43.2 R47.1 R50.2 R53.1 R54.1 R56.2 U3.6 U3.9 U3.12 U3.15 U3.16 U3.21 U4.4 U4.9 U6.6 U6.9 U6.12 U6.15 U6.16 U6.21 USB1.4 USB1.5 | length 1002.4
  Top Layer w8: U4.4@206.34,-2447.39 U4.9@251.61,-2447.39
  Bottom Layer w8: R43.2@1752.94,-3024.94 1757.44,-3024.94 1833.16,-2949.23 U6.6@1833.16,-2935.9 U6.21@1833.16,-2876.84 ; U6.9@1774.1,-2935.9 1774.1,-2918.9 U6.21@1826,-2867 ; U6.12@1774.1,-2798.1 1774.1,-2819.1 1815,-2860 U6.21@1842,-2860 ; U6.21@1833.16,-2851.16 U6.15@1833.16,-2798.1 ; U6.21@1852.84,-2857.16 U6.16@1852.84,-2798.1 ; R50.2@2564,-2914.94 2573.94,-2914.94 2628.16,-2969.16 U3.6@2652.1,-2969.16 U3.21@2711.16,-2969.16 ; U3.9@2652.1,-2910.1 2672.1,-2910.1 U3.21@2721,-2959 ; U3.21@2721,-2956 2766.9,-2910.1 U3.12@2789.9,-2910.1 ; U3.21@2730.84,-2988.84 U3.16@2789.9,-2988.84 ; U3.21@2730.84,-2969.16 U3.15@2789.9,-2969.16
  other v1: 2706,-3907 2823,-3904 2887,-3901 2979,-3900 3058,-3898 1749,-3890 2164,-3880 2645,-3857 2504,-3842 2294,-3839 2386,-3838 2743,-3835 1747,-3824 2172,-3787 -280,-3777 70,-3777 -175,-3775 -56,-3772 2702,-3764 2639,-3762 1752,-3724 69,-3705 -167,-3696 -58,-3693 2176,-3693 -280,-3692 2669,-3687 1747,-3629 -61,-3599 -167,-3598 -263,-3593 2176,-3592 2331,-3581 1900,-3565 1109,-3556 1739,-3555 1544,-3528 2844,-3521 959,-3506 1098,-3500 2173,-3492 1404,-3441 2877,-3437 1503,-3430 1162,-3421 95,-3419 987,-3417 2877,-3361 -163,-3356 -43,-3315 1543,-3257 -100,-3252 2367,-3251 -412,-3250 1951,-3189 -29,-3188 2152.99,-3181.97 2085,-3181 -386,-3135 2731,-3123 607,-3115 2797,-3112 495,-3107 2187,-3104 550,-3077 488,-3044 605,-3044 -367,-3031 2186,-3012 -297,-2993 2721,-2979 2190,-2933 -371,-2931 1993,-2878 -301,-2863 2202,-2853 1189,-2847 1004,-2836 -371,-2829 932,-2827 1431,-2821 1341,-2819 1471,-2786 1263,-2783 1176,-2780 1700,-2780.01 40,-2771 -314,-2759 2675,-2754 -401,-2736 931,-2727 1009,-2725 1853,-2725 2627,-2723 114,-2722 1337,-2722 1186,-2721 1652,-2718 1499,-2715 -488,-2701 2879,-2689 457,-2686 2724,-2685 305,-2675 -348,-2650 126,-2647 256,-2629 -431,-2616 2127,-2616 2625,-2616 204,-2589 407,-2589 313,-2587 2492,-2574 360,-2553 262,-2549 2049,-2531 402,-2519 197,-2518 304,-2515 2843,-2512 2085,-2492 2146,-2488 1866,-2472 1997,-2464 -243,-2457 2072,-2430 2138,-2417 -207,-2410 1877,-2387 1979,-2387 2092,-2366 1672,-2351 961,-2349 2194,-2335 2015,-2333 -262,-2307 -576,-2306 -462,-2304 2120,-2277 1214,-2272 2855,-2266 411,-2262 172,-2261 841,-2261 1993,-2261 298,-2260 981,-2259 2255,-2210 2803,-2185 -778,-2179 -573,-2179 -671,-2177 2733,-2119 2247,-2094 -662,-2083 -758,-2082 -567,-2073 2701,-2028 -760,-1982 -592,-1975 -677,-1968 2699,-1922 2270,-1916 -366,-1907 -738,-1904 2358,-1772 2278,-1771 2665,-1765 2534,-1760 2904,-1757 2795,-1754 3034,-1751 2306,-1665 2934,-1646 2774,-1644 3051,-1644 2606,-1642 2499,-1606 2712,-1606 2851,-1602 2341,-1576 2992,-1552 2574,-1529 2456,-1527 2651,-1521 2895,-1521 2755,-1518 3021,-1497 2289,-1488 2748,-1459 2635,-1456 2847,-1439 2367,-1425 2684,-1408 2563,-1399 2770,-1399 2484,-1395 2960,-1382 2864,-1377 2540,-1348 3020,-1346 2650,-1326 2898,-1309 2802,-1295 2985,-1277 2467,-1275 2741,-1274 2627,-1249 2563,-1226 2672,-1218 2793,-1214 3040,-1200 2883,-1194 2487,-1174 2629,-1169 2966,-1157 2749,-1140 3023,-1129 2601,-1106 2755,-1097 2883,-1086 2681,-1057 3005,-1029
  other v3: 1842,-2852
  other v4: 288,-2429 289,-2385
CTR_OUT1: R1.1 U1.18 | length 421.2
  Top Layer w8: U1.18@1622.32,-1990.75 1622.32,-2203.32 1677,-2258 1677,-2288 1697,-2308 1726,-2308 ; 1714,-2308 1726,-2308 ; R1.1@1758,-2308 1726,-2308
CTR_OUT2: R5.1 U1.25 | length 720.3
  Top Layer w8: R5.1@1597,-2279 1599,-2277 v2(1645,-2277) ; U1.25@1809.33,-1925.79 1851.79,-1925.79 1902,-1976 v2(1902,-2277)
  Bottom Layer w8: v2(1645,-2277) v2(1902,-2277)
CTR_OUT3: R10.1 U1.26 | length 1047.4
  Top Layer w8: R10.1@1375,-2278 v2(1429,-2278) ; U1.26@1809.33,-1902.17 1864.17,-1902.17 1937,-1975 v2(1937,-2297)
  Bottom Layer w8: v2(1429,-2278) 1452,-2301 v2@1933,-2301
CTR_OUT11: R31.2 U1.2 | length 1529.3
  Top Layer w8: R31.2@1160,-700.26 1192.26,-700.26 1202,-710 1202,-807 1235.37,-840.37 1548.37,-840.37 1610,-902 1610,-1007 1450.49,-1166.51 1450.49,-1644.59 1492.62,-1686.72 1492.62,-1716.03 1484.42,-1724.24 1455.76,-1724.24 U1.2@1455,-1725
DIS_COM1: Q4.1 U1.27 | length 1694
  Top Layer w8: Q4.1@1522,-957 1550,-957 1561,-946 v2(1561,-915) ; U1.27@1809.33,-1882.48 1940.52,-1882.48 2020,-1803 v2(2020,-915)
  Bottom Layer w8: v2(1561,-915) 1562,-914 1960,-914 ; 1988,-914 1960,-914 ; v2(2020,-915) 2019,-914 1960,-914
DIS_COM2: Q5.1 U1.28 | length 1720
  Top Layer w8: Q5.1@1318,-957 1347,-957 1357,-967 v2(1357,-1112) ; U1.28@1809.33,-1862.8 1932,-1862.79 1991,-1803.79 v2(1991,-1112)
  Bottom Layer w8: v2(1357,-1112) v2(1991,-1112)
DIS_COM3: Q6.1 U1.40 | length 1446.3
  Top Layer w8: Q6.1@1133,-957 1174,-957 1193,-976 v2(1193,-988) ; U1.40@1681.38,-1636.42 1681.38,-1595.21 1709.54,-1567.04 1780.96,-1567.04 1808,-1540 1808,-1014 v2(1782,-988)
  Bottom Layer w8: v2(1193,-988) 1625,-988 ; 1649,-988 1625,-988 ; v2(1782,-988) 1625,-988
DIS_COM4: Q7.1 U1.39 | length 1665.3
  Top Layer w8: U1.39@1701.06,-1636.42 1701.06,-1600.98 1717,-1585.04 1799.96,-1585.04 1826,-1559 1826,-970 v2(1815,-959)
  Top Layer w20: Q7.1@934,-957 934,-959 v2(975,-959)
  Bottom Layer w8: v2(975,-959) v2(1815,-959)
DS: U1.32 U2.14 | length 2210.5
  Top Layer w8: U2.14@452,-1313 511.01,-1313 549.01,-1350.99 549.01,-1975.01 v2(579,-2005) ; v2(1638,-1828) 1681.95,-1784.05 U1.32@1809.33,-1784.05
  Bottom Layer w8: v2(579,-2005) 603,-2029 1590,-2029 1623,-1996 1623,-1843 v2(1638,-1828)
GND: C1.1 C2.1 C3.1 C4.1 C5.1 C6.1 C7.1 C8.1 C25.2 C26.1 C27.1 C28.2 DL1.K DL2.K J2.2 J3.1 J4.1 J5.2 P2.3 P3.3 P4.2 P5.1 P5.3 P5.5 P5.7 P5.9 Q11.2 Q12.2 R18.2 R29.2 S1.1 S2.1 S3.1 S4.1 U1.8 U1.23 U1.35 U1.44 U1.47 U2.8 U2.13 U5.2 U5.4 | length 672.9
  Top Layer w8: U1.47@1543.58,-1636.42 1543.58,-1671.37 1548,-1675.79 1590.21,-1675.79 1602.64,-1663.36 U1.44@1602.64,-1636.42 v2(1602.64,-1533.36) ; v2(1720.75,-2040.75) U1.23@1720.75,-1990.75 ; U1.35@1809.33,-1725 1842,-1725 v2(1867,-1750) ; C7.1@1901,-1622 v2(1901,-1573) ; C28.2@2520.92,-489.97 2547.65,-489.97 2567.68,-469.94 2603.46,-469.94 U5.2@2606,-467.4
  Top Layer w10: v2(1340,-1957) 1340,-1926 1355,-1911 1355,-1910.79 1422.68,-1843.11 U1.8@1455,-1843.11
  other v1: 6,-2162 2035,-2150 1516,-2136 2141,-2136 -51,-2125 1820,-2023 489,-1997 718,-1938 1550,-1920 -592,-1817 -363,-1800 1571,-1762 -696,-1752 -753,-1670 1102,-1645 -575,-1644 755,-1643 301,-1633 1413,-1633.29 109,-1616 237,-1601 -250,-1581 314,-1546 -696,-1527 461,-1525 -211,-1432 -597,-1406 117,-1371 1727,-1324 -207,-1322 1514,-1321 -701,-1306 1346,-1300 1583,-1296 1511,-1236 1584,-1231 1721,-1204 -223,-1191 -562,-1176 1394,-1173 1273,-1172 2079,-1157 -709,-1155 1582,-1150 -636,-1142 1489,-1054 298,-1049 2082,-1037 -588,-1016 683,-992 -718,-990 124,-984 202,-981 -185,-969 273,-951 2084,-944 132,-914 -610,-904 2422,-888 446,-886 2316,-880 -722,-869 -206,-869 2579,-854 2744,-852 2933,-825 -231,-758 -588,-739 2839,-729 -714,-726 2492,-713 -337,-711 401,-711 2592,-706 2703,-701 3016,-697 -188,-675 2287,-661 2397,-650 -309,-639 -502,-633 473,-630 2719,-620 2603,-605 -400,-604 -241,-592 -623,-571 -722,-562 419,-558 699,-550 3023,-540 1114,-537 958,-523 1361,-523 1780,-519 630,-518 1214,-502 789,-499 1638,-494 -690,-451 3004,-412 1718,-404 -252,-398 -612,-388 1802,-380 1936,-379 2104,-363 1208,-358 1408,-354 2854,-345 2941,-328 -729,-325 -89,-321 -645,-236 -66,-175 -759,-167 -669,-89
  other v2: 1502,-1524
IIC_SCL: J3.2 R12.2 U1.42 | length 1747.9
  Top Layer w8: U1.42@1642.01,-1636.42 1642.01,-1574.58 1691.55,-1525.04 1707,-1525.04 ; 1698.55,-1525.04 1707,-1525.04 ; R12.2@1741,-1481.74 1741,-1509.54 v2(1725.5,-1525.04) 1707,-1525.04 ; v2(1850,-1496) 1850,-619 v2(1850,-314)
  Bottom Layer w8: v2(1725.5,-1525.04) 1754.54,-1496 v2(1850,-1496) ; v2(1850,-314) 1938,-314 1963,-289 J3.2@1963,-207
IIC_SDA: J3.3 R13.2 U1.43 | length 1851.6
  Top Layer w8: U1.43@1622.32,-1636.42 1622.32,-1542.27 v2(1650,-1514.59) 1665,-1499.59 1665,-1481.74 R13.2@1668,-1481.74 ; v2(1873,-338) 1873,-624 1874,-625 v2(1874,-1472)
  Bottom Layer w8: v2(1650,-1514.59) 1692.59,-1472 v2(1874,-1472) v2@1873,-1471 ; v2(1873,-338) 2025,-338 2063,-300 J3.3@2063,-207
IR: R17.1 U1.38 | length 2085.4
  Top Layer w8: v2(154,-1677) 156,-1675 156,-1384 ; 156,-1466 156,-1384 ; R17.1@156,-1288 156,-1384 ; v2(1669,-1690) 1700,-1690 1720.75,-1669.25 U1.38@1720.75,-1636.42
  Bottom Layer w8: v2(154,-1677) 167,-1690 v2(1669,-1690)
KEY1: S1.2 U1.19 | length 544.5
  Top Layer w8: U1.19@1642.01,-1990.75 1642.01,-1915.99 1649,-1909 v2(1665,-1909)
  Bottom Layer w8: v2(1665,-1909) 1665.71,-1908.29 S1.2@1718.77,-1908.29 1770.71,-1908.29 1791,-1888 1791,-1664 1759.7,-1632.7 S1.2@1718.77,-1632.7
KEY2: S2.2 U1.4 | length 1782.5
  Top Layer w8: v2(712,-1847) v2(712,-1597) ; v2(1186,-1632) 1186,-1644 1306.37,-1764.37 U1.4@1455,-1764.37
  Bottom Layer w8: v2(712,-1847) 1224.41,-1847 S2.2@1285.7,-1908.29 ; v2(712,-1597) 729,-1580 1134,-1580 v2(1186,-1632) ; v2@1185.7,-1632.7 S2.2@1285.7,-1632.7
KEY3: S3.2 U1.15 | length 1617.3
  Top Layer w8: v2@794,-2178 v2(794,-1908) v2(794,-1637) ; U1.15@1563.27,-1990.75 1563.27,-2059.27 1568,-2064 1568,-2177 v2(1569,-2178)
  Bottom Layer w8: v2(794,-1637) S3.2@848.33,-1637 ; v2@794.29,-1908.29 S3.2@852.63,-1908.29 ; v2(795,-2178) v2(1569,-2178)
KEY4: S4.2 U1.14 | length 1878
  Top Layer w8: v2(421,-2102) v2(421,-1969) v2(421,-1573) ; U1.14@1543.58,-1990.75 1543.96,-1991.13 v2(1543.96,-2090.04)
  Bottom Layer w8: S4.2@419.56,-1908.29 419.56,-1967.56 v2(421,-1969) ; S4.2@419.56,-1632.7 421,-1631.26 v2(421,-1573) ; v2(421,-2102) 1360.08,-2102 1372.04,-2090.04 1471,-2090.04 v2(1543.96,-2090.04)
LED_CTRL1: Q11.1 U1.3 | length 1488.4
  Top Layer w8: Q11.1@1355,-695 1352,-695 1307,-740 1307,-800 1329.37,-822.37 1565,-822.37 1628,-885.37 1628,-1034 1468.49,-1193.51 1468.49,-1533 ; U1.3@1455,-1744.68 1489.43,-1744.68 1510.62,-1723.49 1510.62,-1679.27 1468.49,-1637.13 1468.49,-1533 ; 1468.49,-1513.69 1468.49,-1533
LED_CTRL2: Q12.1 U1.41 | length 1201.6
  Top Layer w8: Q12.1@1640,-690 1620,-690 1606.74,-703.26 1606.74,-814.74 1629.5,-837.5 1725.5,-837.5 1748,-860 1748,-1133 1790,-1175 1790,-1529 1769.96,-1549.04 1696,-1549.04 1695.48,-1548.52 1661.69,-1582.31 U1.41@1661.69,-1636.42